# Altium PCB PCB1.PcbDoc
Units mm, origin at the board's own origin, x right, y up, seen from the top; angles counter-clockwise.
Board outline 90 x 47 mm, 2 copper layers (Top Layer, Bottom Layer); 79 components, 46 nets, 192 pads, 112 vias.
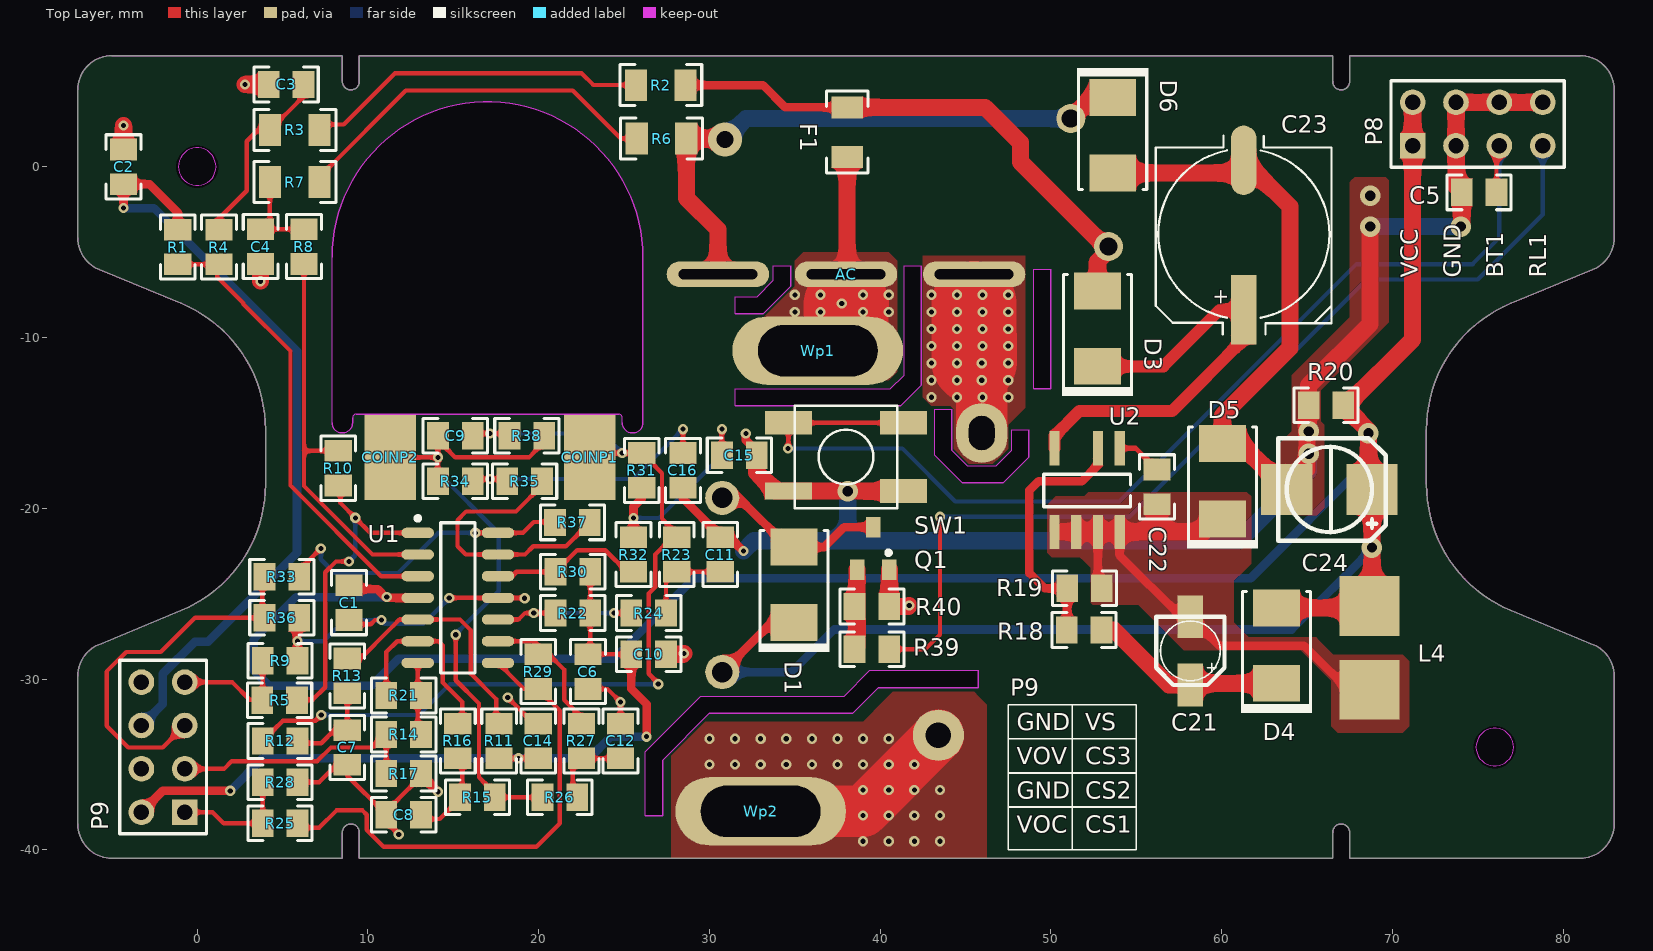
[diagram p0: Top Layer view]
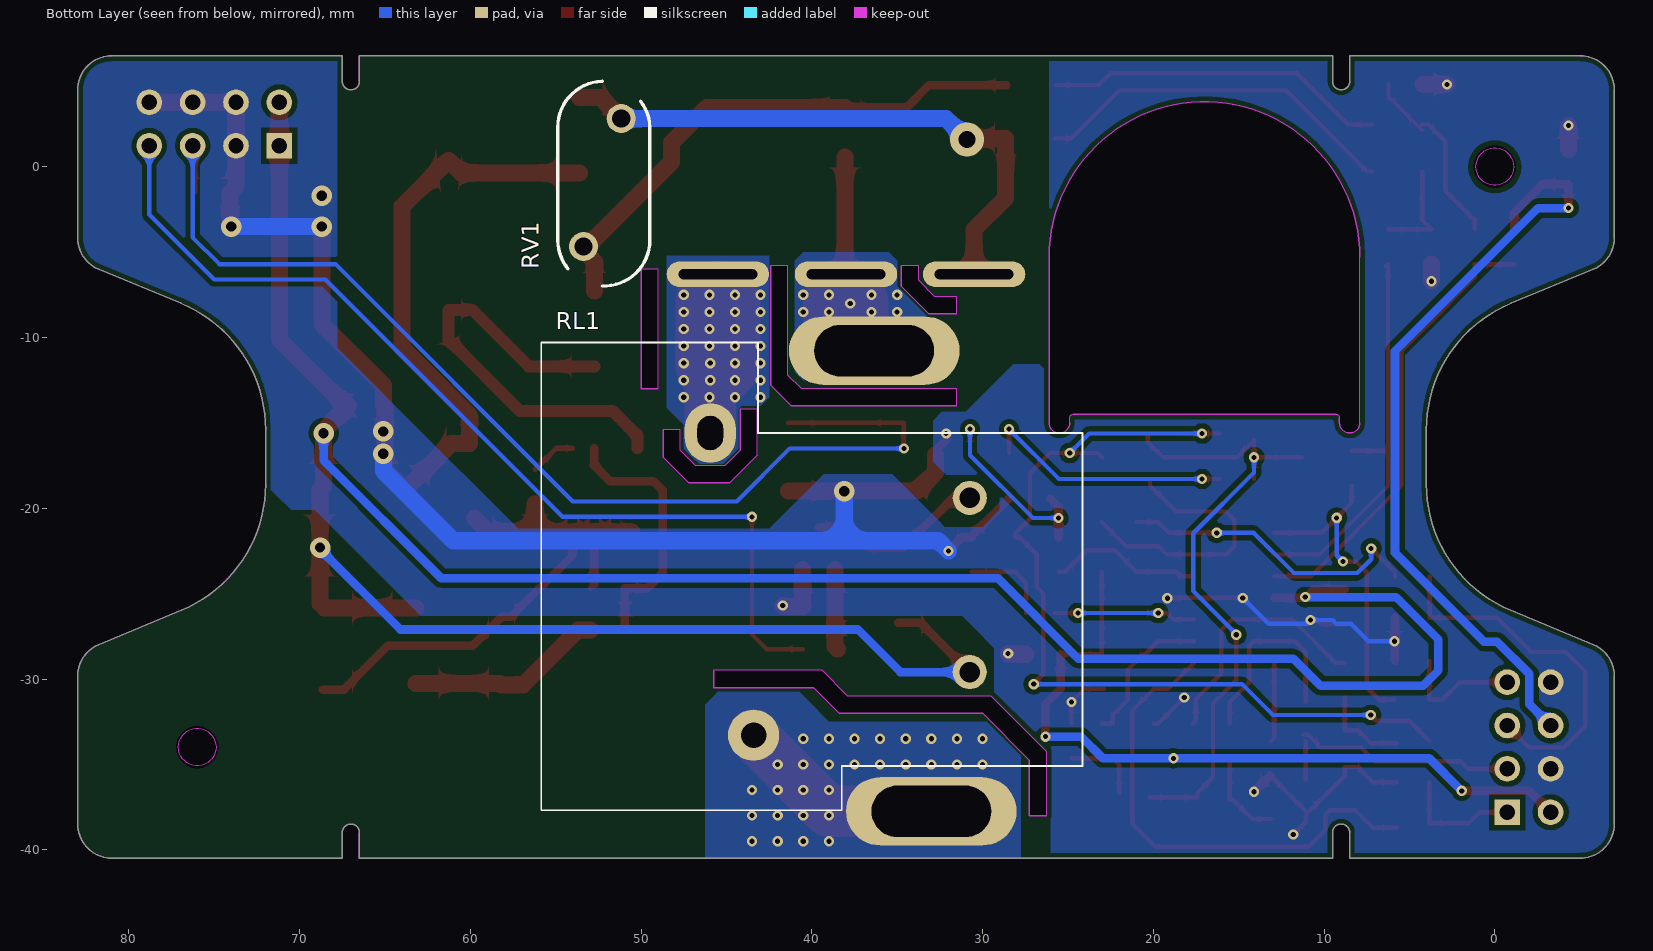
[diagram p1: Bottom Layer view, seen from below]

## Layer stack, top to bottom
Top Solder: solder mask 0.0102, Solder Resist, Dk 3.5
Top Layer: signal copper 0.0356
Dielectric 1: dielectric 0.32, FR-4, Dk 4.8
Bottom Layer: signal copper 0.0356
Bottom Solder: solder mask 0.0102, Solder Resist, Dk 3.5

## Board outline
-7.002,-38.492 -7.002,-29.829 cw(c-5.002,-29.829) -5.767,-27.981 -0.941,-25.982 ccw(c-4.002,-18.591) 3.998,-18.591 3.998,-15.394 ccw(c-4.002,-15.394) -0.941,-8.003 -5.767,-6.004 cw(c-5.002,-4.156) -7.002,-4.156 -7.002,4.508 cw(c-5.002,4.508) -5.002,6.508 8.498,6.508 8.498,5.008 ccw(c8.998,5.008) 9.498,5.008 9.498,6.508 66.498,6.508 66.498,5.008 ccw(c66.998,5.008) 67.498,5.008 67.498,6.508 80.998,6.508 cw(c80.998,4.508) 82.998,4.508 82.998,-4.156 cw(c80.998,-4.156) 81.763,-6.004 76.937,-8.003 ccw(c79.998,-15.394) 71.998,-15.394 71.998,-18.591 ccw(c79.998,-18.591) 76.937,-25.982 81.763,-27.981 cw(c80.998,-29.829) 82.998,-29.829 82.998,-38.492 cw(c80.998,-38.492) 80.998,-40.492 67.498,-40.492 67.498,-38.992 ccw(c66.998,-38.992) 66.498,-38.992 66.498,-40.492 9.498,-40.492 9.498,-38.992 ccw(c8.998,-38.992) 8.498,-38.992 8.498,-40.492 -5.002,-40.492 cw(c-5.002,-38.492)
cut-out: 26.25,-38 26.25,-34.25 29.5,-31 37.9,-31 39.4,-29.5 45.75,-29.5 45.75,-30.5 39.9,-30.5 38.4,-32 30,-32 27.25,-34.75 27.25,-38
cut-out: 31.5,-8.6 31.5,-7.6 32.8,-7.6 33.75,-6.65 33.75,-5.8 34.75,-5.8 34.75,-7 33.15,-8.6
cut-out: 31.5,-14 31.5,-13 40.6,-13 41.4,-12.2 41.4,-5.8 42.4,-5.8 42.4,-12.8 41.2,-14
cut-out: 49,-13 49,-6 50,-6 50,-13
cut-out: 7.898,-14.992 7.898,-5.292 cw(c16.998,-5.292) 26.098,-5.292 26.098,-14.992 cw(c25.498,-14.992) 24.898,-14.992 24.898,-14.692 ccw(c24.698,-14.692) 24.698,-14.492 9.298,-14.492 ccw(c9.298,-14.692) 9.098,-14.692 9.098,-14.992 cw(c8.498,-14.992)
cut-out: 44.796,-18.504 43.196,-16.904 cw(c43.2,-16.9) 43.195,-16.9 43.195,-14.2 cw(c43.2,-14.2) 43.2,-14.195 44.2,-14.195 cw(c44.2,-14.2) 44.205,-14.2 44.205,-16.598 45.102,-17.495 46.798,-17.495 47.695,-16.598 47.695,-15.4 cw(c47.7,-15.4) 47.7,-15.395 48.7,-15.395 cw(c48.7,-15.4) 48.705,-15.4 48.705,-17 cw(c48.7,-17) 48.704,-17.004 47.204,-18.504 cw(c47.2,-18.5) 47.2,-18.505 44.8,-18.505 cw(c44.8,-18.5)

## Design rules (kind name [scope] priority, off if disabled: settings)
Clearance Clearance_1 [InNet('GND')] p1: gap=0.3
Clearance cutout [IsRegion] p2: gap=0.01
Clearance keepout [OnLayer('Keep-Out Layer')] p3: gap=0.01
Clearance [All] p4: gap=0.254
HoleSize [All] p1: absolutevalues=TRUE maxlimit=5 minlimit=0.01 maxpercent=80.000 minpercent=20.000
PolygonConnect [All] p1: connectstyle=Direct reliefconductorwidth=0.254 reliefentries=4 polygonreliefangle="90 Angle" airgapwidth=0.254
RoutingVias [All] p1: holewidth=0.3 width=0.6 viastyle="Through Hole" minholewidth=0.3 minwidth=0.6 maxholewidth=5 maxwidth=5
SilkToSilkClearance [All] p1: silktosilkclearance=0.1
SilkToSolderMaskClearance [IsPad] p1: minsilkscreentomaskgap=0.01 clearancetoexposedcopper=TRUE
SolderMaskExpansion [All] p1: expansion=0.102
Width [All] p1: maxlimit=5 minlimit=0.254 preferedwidth=0.254
27 further rules are at their usual default settings.

## Components (designator, comment, footprint, x,y, rotation, side; value= is the part's Value field where it differs from the comment)
AC "Header 3" CHAN3DONG 30.498,-6.292 r0 top
C1 "104" 0805_HV 8.89,-25.527 r90 top
C2 "104" 0805_HV -4.318,0 r270 top
C3 "221" 0805_HV 5.207,4.826 r0 top
C4 "221" 0805_HV 3.708,-4.674 r90 top
C5 "221" 0805_HV 75.082,-1.499 r0 top
C6 "104" 0805_HV 22.885,-29.566 r90 top
C7 "221" 0805_HV 8.788,-34.011 r90 top
C8 "221" 0805_HV 12.09,-37.948 r0 top
C9 "221" 0805_HV 15.113,-15.748 r0 top
C10 "104" 0805_HV 26.441,-28.55 r180 top
C11 "221" 0805_HV 30.632,-22.708 r270 top
C12 "221" 0805_HV 24.79,-33.63 r270 top
C14 "104" 0805_HV 19.964,-33.63 r270 top
C15 "221" 0805_HV 31.75,-16.891 r180 top
C16 "221" 0805_HV 28.448,-17.78 r90 top
C21 "10uF" TU_NHOM_10uF_MH 58.166,-28.346 r0 top
C22 "104" 0805_HV 56.21,-18.745 r90 top
C23 "400AX6R8M8x11" PANACAP-G-GENERIC 61.29,-3.937 r90 top
C24 "220uF" TU_NHOM_2.5_MH 66.309,-18.898 r270 top
COINP1 "Socket" PIN1#1 96.749,-39.907 r90 top
COINP2 "Socket" PIN1#2 86.589,-39.907 r90 top
D1 "US1M-13-F" SMB 34.95,-24.486 r270 top
D3 "US1M-13-F" SMB 52.73,-9.474 r270 top
D4 "US1M-13-F" SMB 63.221,-28.041 r270 top
D5 "US1M-13-F" SMB 60.046,-18.415 r270 top
D6 "US1M-13-F" SMB 53.619,1.854 r90 top
F1 "Res" 1206 38.067,2.03 r90 top
L4 "680uF" "Inductor 4.5x5" 68.758,-28.423 r270 top
P8 "Header 4X2" HDR2X4 71.188,1.237 r0 top
P9 "Header 4X2" HDR2X4 -0.732,-37.803 r90 top
Q1 "C1815" SOT23B 39.599,-22.352 r180 top
R1 "22K" 0805_HV -1.143,-4.699 r90 top
R2 "1.2M" 1206 27.148,4.79 r180 top
R3 "1.2M" 1206 5.715,2.159 r180 top
R4 "2.2K" 0805_HV 1.27,-4.699 r90 top
R5 "10K" 0805_HV 4.826,-31.242 r0 top
R6 "1.2M" 1206 27.196,1.657 r180 top
R7 "1.2M" 1206 5.715,-0.889 r180 top
R8 "2.2K" 0805_HV 6.248,-4.674 r90 top
R9 "10K" 0805_HV 4.851,-28.931 r0 top
R10 "22K" 0805_HV 8.255,-17.653 r90 top
R11 "22K" 0805_HV 17.678,-33.63 r270 top
R12 "220K" 0805_HV 4.851,-33.63 r180 top
R13 "220K" 0805_HV 8.788,-29.82 r270 top
R14 "10K" 0805_HV 12.09,-33.249 r0 top
R15 "220K" 0805_HV 16.408,-36.932 r0 top
R16 "220K" 0805_HV 15.265,-33.63 r270 top
R17 "10K" 0805_HV 12.09,-35.535 r0 top
R18 "13k" 0805_HV 51.943,-27.127 r0 top
R19 "2K" 0805_HV 51.968,-24.689 r180 top
R20 "3k3" 0805_HV 66.116,-13.97 r0 top
R21 "100K" 0805_HV 12.09,-30.963 r180 top
R22 "22K" 0805_HV 21.996,-26.137 r0 top
R23 "1K" 0805_HV 28.092,-22.708 r90 top
R24 "1K" 0805_HV 26.441,-26.137 r0 top
R25 "10K" 0805_HV 4.851,-38.456 r0 top
R26 "1K" 0805_HV 21.234,-36.932 r180 top
R27 "1K" 0805_HV 22.504,-33.63 r270 top
R28 "10K" 0805_HV 4.851,-36.043 r0 top
R29 "22K" 0805_HV 19.964,-29.566 r90 top
R30 "22K" 0805_HV 21.996,-23.724 r0 top
R31 "1M" 0805_HV 26.035,-17.78 r90 top
R32 "1M" 0805_HV 25.552,-22.708 r90 top
R33 "10K" 0805_HV 4.953,-24.003 r0 top
R34 "1M" 0805_HV 15.113,-18.415 r180 top
R35 "1M" 0805_HV 19.177,-18.415 r180 top
R36 "10K" 0805_HV 4.953,-26.416 r0 top
R37 "22K" 0805_HV 21.971,-20.828 r0 top
R38 "1K" 0805_HV 19.304,-15.748 r0 top
R39 "1K" 0805_HV 39.516,-28.25 r0 top
R40 "10K" 0805_HV 39.516,-25.75 r0 top
RL1 "Component_1" RELAY30ASLA12VDC 45.95,-15.593 r180 bottom locked
RV1 "S10K275E2" VAR_S10K275E2 52.181,-0.984 r270 bottom
SW1 "PB SW" Switch-PB-6.2x6.3mm-SMD 37.998,-16.992 r180 top locked
U1 "LM324" D014_L 15.265,-25.248 r0 top
U2 "LNK306" "SOP 7" 54.026,-16.485 r270 top
Wp1 "Socket" PIN1#3 37.303,-48.452 r0 top
Wp2 "Socket" PIN1#4 85.75,-37.75 r0 top

## Footprints (in the part's own frame and the unit in brackets; to place one, negate y for a bottom-side part, rotate by r counter-clockwise, add the part's x,y. Pads: shape width x height; smd on the part's side, far side on the other; paste and mask are expansions set on the pad)
0805_HV [mil] "0805 with 30mil clearance between pads"
  rect 50x63 smd: 1(-40,0) 2(40,0)
  silkscreen extent -74,-40 74,40, body extent -43,-29 43,29, height 57
1206 [mm] "1206 from SM-752 data"
  rect 1.3x1.85 smd: 1(1.45,0) 2(-1.45,0)
  silkscreen extent -2.4,-1.21 2.4,1.21, body extent -1.7,-0.9 1.7,0.9, height 1.35
CHAN3DONG [mm]
  oval 6x1.5 hole 0.6 slot 4.6 at 0 deg: 1(0,0) 2(7.5,0) 3(15,0)
D014_L [mm] "14-Pin Small Outline Integrated Circuit 1.27 mm Pitch, IPC High Density"
  oval 1.9x0.6 smd: 1(-2.35,3.81) 2(-2.35,2.54) 3(-2.35,1.27) 4(-2.35,0) 5(-2.35,-1.27) 6(-2.35,-2.54) 7(-2.35,-3.81) 8(2.35,-3.81) 9(2.35,-2.54) 10(2.35,-1.27) 11(2.35,0) 12(2.35,1.27) 13(2.35,2.54) 14(2.35,3.81)
  silkscreen extent -2.47,-4.4 1,4.78, body extent -1.95,-4.33 1.95,4.33, height 1.75
HDR2X4 [mm] "Connector; Header; 4x2 Position"
  rect 1.5x1.5 hole 0.9: 1(0,0)
  round 1.5 hole 0.9: 2(0,2.54) 3(2.54,0) 4(2.54,2.54) 5(5.08,0) 6(5.08,2.54) 7(7.62,0) 8(7.62,2.54)
  silkscreen extent -1.27,-1.27 8.89,3.81
"Inductor 4.5x5" [mm]
  rect 3.5x3.5 smd: 1(2.2,-0.1) 2(-2.7,-0.1)
  body extent -2.6,-2.6 2.2,2.2, height 2
PANACAP-G-GENERIC [mil]
  rect 160x59.06 smd: 1(-175,0)
  oval 160x59.06 smd: 2(170,0)
  silkscreen extent -231,-203 227,203, body extent -233,-203 223,203, height 402
PIN1#1 [mm] "Connector; Plug"
  rect 5x3 smd: 1(22.889,73.762)
PIN1#2 [mm] "Connector; Plug"
  rect 5x3 smd: 1(22.889,75.286)
PIN1#3 [mm] "Connector; Plug"
  oval 10x4 hole 3 slot 7 at 0 deg: 1(-0.956,37.682)
PIN1#4 [mm] "Connector; Plug"
  oval 10x4 hole 3 slot 7 at 0 deg: 1(-52.75,0)
RELAY30ASLA12VDC [mm]
  round 2 hole 1.2 paste+0 mask+0: 1(15.202,-3.8) 2(15.2,-14)
  round 3 hole 1.5 paste+0 mask+0: 3(2.54,-17.7)
  oval 3x3.5 hole 1.5 slot 2 at 90 deg paste+0 mask+0: 4(0,0)
  silkscreen extent -9.9,-22.1 21.8,5.3
SMB [mm] "Molded Diode, 2-Leads, Body 5.4x3.6mm, IPC Medium Density, based on OnSemi component dimensions"
  rect 2.159x2.743 smd: 1(2.21,0) 2(-2.21,0)
  silkscreen extent -3.18,-2.08 3.94,2.08, body extent -2.7,-1.8 2.7,1.8, height 2.32
"SOP 7" [mm]
  rect 2x0.6 smd: 1(0,0) 2(0,-1.27) 4(0,-3.81) 5(4.9,-3.81) 6(4.9,-2.54) 7(4.9,-1.27) 8(4.9,0)
  silkscreen extent 1.52,-4.44 3.43,0.64
SOT23B [mm] "SOT 23B"
  rect 0.85x1.2 smd: 1(0.95,1.25) 2(0,-1.25) 3(-0.94,1.245)
  silkscreen extent -1.02,0.13 -0.77,0.38, body extent -1.5,-1.2 1.5,1.3, height 1.06
Switch-PB-6.2x6.3mm-SMD [mm]
  rect 2.75x1.4 smd: 1(-3.375,2) 2(-3.375,-2) 2(3.375,-2)
  rect 2.75x1 smd: 1(3.375,2)
  silkscreen extent -3,-3 3,3, body extent -4,-3 4,3.3, height 3.1
TU_NHOM_2.5_MH [mm]
  rect 3x3 smd: 1(0,2.5) 2(0,-2.5)
  silkscreen extent -3,-3 3,3.3, body extent -3.3,-3.5 3.3,3.5, height 8.11
TU_NHOM_10uF_MH [mm]
  rect 1.5x2.5 smd: 1(0,-2) 2(0,2)
  silkscreen extent -2,-2 2,2, body extent -2.15,-2.5 2.15,2.5, height 5.4
VAR_S10K275E2 [mm] "EPCOS"
  round 1.7 hole 1.067: 1(-3.81,1.016) 2(3.69,-1.184)
  silkscreen extent -6,-2.7 6,2.7, body extent -6.02,-2.7 5.98,2.7, height 15

## Part data
AC: "Header, 3-Pin"
C1 C2 C3 C4 C5 C6 C7 C8 C9 C10 C11 C12 C14 C15 C16 C22: library part CM, "Cap SMD"
C21: library part TU_NHOM_10uF_25V_MH, "TU_NHOM_10uF_25V_MH"
C23: "CAP, AL, 6.8uF, 400V, +/-20%, TH"
C24: library part TU_NHOM_220uF_25V_MH, "TU_NHOM_220uF_25V_MH"
D1 D3 D4 D5 D6: library part MURS160-13-F, "Diode, Ultrafast, 600V, 1A, SMB"
F1: library part Res-SMD, "Resistor"
L4: library part "Inductor 4.5x5_MH"
P8 P9: "Header, 4-Pin, Dual row"
Q1: "NPN 600mW, ECB"
R1 R2 R3 R4 R5 R6 R7 R8 R9 R10 R11 R12 R13 R14 R15 R16 R17 R18 R19 R20 R21 R22 R23 R24 R25 R26 R27 R28 R29 R30 R31 R32 R33 R34 R35 R36 R37 R38 R39 R40: library part R, "Resistor 1/4W"
RV1: "Varistor 275V RMS 10MM Radial, TH"
SW1: library part Switch-PB-6.2x6.3mm-SMD, "Tactile Switch, SPNO, SMD, 160gf, 6.2x6.3x2.5mm"
U1: library part LM324_MH, "Op x 4"
U2: library part Component_1

## Free pads (board coordinates)
  round 2 hole 1 paste+0: 1(30.912,1.6)
  round 2 hole 2.5 paste+0: 2(0,0) 3(76,-34)

## Via types
v1: diameter 0.6, hole 0.3, Top Layer to Bottom Layer, tented both sides, 104 vias
v2: diameter 1.2, hole 0.6, Top Layer to Bottom Layer, tented both sides, 8 vias

## Nets (pads, with @x,y where several pads share a name; then routed paths per layer and width w, separated by ;. In a path a pad name is that pad's centre, name@x,y a point inside that pad or via, vN(x,y) a via of type N, cw(c..) or ccw(c..) an arc to the next point about the centre after c; other vN are vias at no path point)
BP: C22.2 U2.1 | length 2.7
  Top Layer w0.3: U2.1 54.966,-16.485 C22.2
BUTTON1: C5.2 P8.5 SW1.2 | length 65.8
  Top Layer w0.254: v1(34.6,-16.5) 34.623,-16.477 34.623,-14.992 SW1.2@41.373,-14.992 ; C5.2 76.098,1.068 P8.5
  Bottom Layer w0.254: v1(34.6,-16.5) 41.3,-16.5 44.4,-19.6 54,-19.6 67.9,-5.7 74.7,-5.7 76.268,-4.132 P8.5
C1: R14.2 R21.1 U1.7 | length 4.7
  Top Layer w0.254: U1.7 12.915,-33.439 R14.2@13.106,-33.63
C2: R25.2 R29.1 U1.8 | length 29.3
  Top Layer w0.254: R25.2@5.74,-38.71 7.137,-38.71 8.153,-37.694 9.677,-37.694 9.931,-37.948 9.931,-38.837 10.012,-38.918 10.012,-38.925 10.915,-39.827 19.863,-39.827 21.234,-38.456 21.234,-35.974 21.234,-31.852 R29.1 19.139,-30.582 U1.8
C3: R33.2 R37.1 U1.14 | length 18.2
  Top Layer w0.254: R33.2@5.842,-24.003 5.842,-23.749 v1(7.239,-22.352) ; v1(16.281,-21.438) U1.14 19.075,-21.438 19.71,-20.803 R37.1@20.98,-20.803
  Bottom Layer w0.254: v1(7.239,-22.352) 7.239,-22.987 8.047,-23.795 11.765,-23.795 14.122,-21.438 v1(16.281,-21.438)
CUR_N: C9.1 COINP2.1 R15.2 R26.2 R34.2 R38.2 | length 38.8
  Top Layer w0.254: COINP2.1 14.034,-17.018 v1@14.097,-16.954 ; R34.2@14.097,-18.288 v1(14.097,-17.018) v1@14.097,-16.954 ; v1(15.138,-27.407) 15.138,-30.074 16.497,-31.432 16.497,-35.75 17.424,-36.678 R15.2 R26.2 ; R38.2@20.32,-15.621 R38.2 20.32,-16.129 19.431,-17.018 15.113,-17.018 14.097,-16.002 v1@14.097,-16.954
  Bottom Layer w0.254: v1(14.097,-17.018) 14.097,-17.907 17.653,-21.463 17.653,-24.847 15.138,-27.362 v1(15.138,-27.407)
CUR_P: C9.2 COINP1.1 R12.2 R23.2 R31.2 R38.1 | length 53.5
  Top Layer w0.254: R12.2 5.016,-32.448 6.921,-32.448 v1(7.264,-32.106) ; C9.2@16.129,-15.621 v1(17.145,-15.621) R38.1@18.288,-15.621 ; COINP1.1 23.241,-16.764 v1(24.892,-16.764) R31.2 27.216,-17.945 27.216,-20.612 28.092,-21.488 R23.2 27.838,-21.692 26.822,-22.708 26.822,-24.613 26.441,-24.994 26.441,-29.693 27,-30.251 v1(27,-30.3)
  Bottom Layer w0.254: v1(7.264,-32.106) 12.994,-32.106 14.8,-30.3 v1(27,-30.3) ; v1(17.145,-15.621) 23.749,-15.621 v1(24.892,-16.764)
CURRENT_SIGNAL1: P9.1 R25.1 R28.1 | length 7.3
  Top Layer w0.254: P9.1 0.896,-37.803 1.549,-38.456 R25.1 R28.1
CURRENT_SIGNAL2: P9.3 R14.1 R17.1 | length 15.1
  Top Layer w0.254: P9.3 1.567,-35.263 2.019,-34.811 7.03,-34.811 7.83,-34.011 10.185,-34.011 10.947,-33.249 R14.1 R14.1@11.201,-33.249 ; R17.1@11.074,-35.916 R17.1 R14.1@11.074,-33.63
CURRENT_SIGNAL3: P9.5 R33.1 R36.1 | length 21.6
  Top Layer w0.254: P9.5 -2.02,-34.011 -4.039,-34.011 -5.309,-32.741 -5.309,-29.566 -4.166,-28.423 -2.134,-28.423 -0.127,-26.416 3.81,-26.416 R33.1@3.81,-24.003
FB: R18.1 R19.2 U2.2 | length 15.5
  Top Layer w0.5: R18.1 50.952,-27.102 R19.2 49.632,-24.689 48.743,-23.8 48.743,-18.948 49.276,-18.415 51.816,-18.415 52.756,-17.475 U2.2
GND: C1.1 C2.1 C3.1 C4.1 C5.1 C6.1 C7.1 C8.1 C10.1 C11.1 C12.1 C14.1 C15.1 C16.1 C23.2 C24.2 D5.2 D6.2 P8.3 P8.4 P8.6 P8.8 P9.4 P9.8 Q1.3 R9.2 R17.2 R20.1 R28.2 R36.2 R40.2 SW1.1 U1.11 | length 169.1
  Top Layer w0.254: R28.2@5.74,-36.043 R28.2 7.137,-36.043 8.026,-35.154 8.788,-35.154 8.788,-35.662 10.963,-37.837 R17.2@13.15,-35.65 ; C1.1@8.763,-26.797 10.16,-26.797 10.414,-26.543 v1(10.795,-26.543) ; C8.1 11.074,-38.374 v1(11.8,-39.1) ; v1(14.757,-25.248) U1.11 19.152,-25.248 v1(19.177,-25.273) ; v1(18.186,-31.09) 19.71,-32.614 C14.1 ; C6.1 24.028,-30.582 v1(24.79,-31.344) C12.1
  Top Layer w0.5: R36.2@5.842,-26.416 5.842,-27.762 v1(5.867,-27.788) R9.2 ; R17.2@13.15,-35.65 v1(14.1,-36.6) ; C16.1@28.448,-19.431 30.632,-21.615 C11.1 31.192,-21.692 v1(32,-22.5) ; v1(32.131,-15.621) 32.131,-16.002 32.766,-16.637 C15.1
  Top Layer w1: C2.1 v1(-4.318,2.413) ; v1(2.794,4.826) C3.1 ; v1(3.7,-6.7) 3.708,-6.692 C4.1 ; C10.1 28.45,-28.55 v1(28.5,-28.5) ; C15.1 32.766,-17.907 33.851,-18.992 34.623,-18.992 SW1.1@41.373,-18.992 ; Q1.3 40.538,-25.744 R40.2 41.65,-25.75 v1(41.7,-25.7) ; D6.2 60.554,-0.356 C23.2 64,-2.329 64,-10.6 60.046,-14.554 D5.2 61.116,-16.205 C24.2 65,-17.706 65,-14.07 R20.1 65.1,-12.8 68.7,-9.2 v2(68.7,-3.5) ; v2(74,-3.5) 74.066,-3.434 C5.1 73.728,-1.16 P8.3 P8.4 P8.6 P8.8
  Bottom Layer w0.254: v1(5.867,-27.788) 7.391,-27.788 8.407,-26.772 9.265,-26.772 9.493,-26.543 10.751,-26.543 10.979,-26.772 13.233,-26.772 v1(14.757,-25.248)
  Bottom Layer w1: v1(32,-22.5) 32.6,-21.9 38.1,-21.9 ; v2(38.1,-19) 38.1,-21.9 ; v2(65.1,-16.8) 65.1,-17.8 61,-21.9 38.1,-21.9 ; v2(68.7,-3.5) v2(74,-3.5)
  other v2: 65.1,-15.5 68.7,-1.7
L: AC.2 F1.2 Wp1.1 | length 13
  Top Layer w0.5: 38.024,-7.061 38.024,-6.267 AC.2@38.067,-6.223
  Top Layer w1: Wp1.1@35,-10.5 36.009,-10.035 Wp1.1@37.998,-9.119 ; AC.2@38.067,-6.223 F1.2
  Top Layer w3: v1@38.024,-8.077 38.024,-7.061
  Top Layer w5: Wp1.1@37.998,-9.119 37.998,-8.103 v1@38.024,-8.077
  other v1: 35,-8.5 36.5,-8.5 39,-8.5 40.5,-8.5 37.75,-8 35,-7.5 36.5,-7.5 39,-7.5 40.5,-7.5
L1: AC.3 RL1.4 | length 7.6
  Top Layer w3: RL1.4 v1(45.95,-12.5) v1(45.95,-11.5) v1@45.95,-11.381
  Top Layer w5: 45.498,-8.026 45.499,-8.499 45.499,-8.501 45.499,-8.999 45.499,-9.499 45.499,-9.501 45.499,-9.999 45.5,-10.499 45.5,-10.501 45.5,-11.4
  other v1: 43,-13.5 44.5,-13.5 46,-13.5 47.5,-13.5 43,-12.5 44.5,-12.5 47.5,-12.5 43,-11.5 44.5,-11.5 47.5,-11.5 43,-10.5 44.5,-10.5 46,-10.5 47.5,-10.5 43,-9.5 44.5,-9.5 46,-9.5 47.5,-9.5 43,-8.5 44.5,-8.5 46,-8.5 47.5,-8.5 43,-7.5 44.5,-7.5 46,-7.5 47.5,-7.5
LL: D3.2 F1.1 R2.2 RV1.2 | length 32.2
  Top Layer w0.5: R2.2 33.133,4.79 34.442,3.48 F1.1
  Top Layer w1: F1.1 46.152,3.48 48.209,1.422 48.209,0.291 53.326,-4.826 53.442,-4.826 52.73,-5.537 D3.2
LOUT: RL1.3 Wp2.1 | length 12.3
  Top Layer w3: Wp2.1 39,-37.75 43.41,-33.34 RL1.3
  other v1: 39,-39.5 40.5,-39.5 42,-39.5 43.5,-39.5 39,-38 40.5,-38 42,-38 43.5,-38 39,-36.5 40.5,-36.5 42,-36.5 43.5,-36.5 30,-35 31.5,-35 33,-35 34.5,-35 36,-35 37.5,-35 39,-35 40.5,-35 42,-35 30,-33.5 31.5,-33.5 33,-33.5 34.5,-33.5 36,-33.5 37.5,-33.5 39,-33.5 40.5,-33.5
N: AC.1 D6.1 pad.1 R6.2 RV1.1 | length 34.7
  Top Layer w1: AC.1 30.498,-3.676 28.646,-1.823 R6.2 30.855,1.657 pad.1 ; RV1.1 52.403,4.064 D6.1
  Bottom Layer w1: pad.1 32.138,2.826 RV1.1
NetC3_2: C3.2 R3.1 R4.2 | length 11.2
  Top Layer w0.254: R4.2@1.168,-3.658 1.168,-3.132 2.9,-1.4 2.9,1.503 3.878,2.481 R3.1@4.289,2.481 ; R3.1 6.223,4.117 C3.2
NetC4_2: C4.2 R7.1 R8.2 | length 6.2
  Top Layer w0.254: R7.1@4.255,-0.273 4.255,-3.111 C4.2 R8.2
NetC7_2: C7.2 R12.1 R13.2 | length 5.3
  Top Layer w0.254: R12.1@5.74,-33.757 7.264,-33.757 8.026,-32.995 C7.2 R13.2@8.788,-31.09
NetC8_2: C8.2 R15.1 R16.2 | length 5.3
  Top Layer w0.254: C8.2@13.106,-38.202 14.198,-38.202 15.341,-37.059 15.519,-37.059 R16.2@15.519,-34.646
NetC11_2: C11.2 R23.1 R24.2 | length 5.2
  Top Layer w0.254: R24.2 27.457,-24.359 R23.1 C11.2
NetC12_2: C12.2 R26.1 R27.2 | length 4.6
  Top Layer w0.254: R26.1@21.996,-36.678 21.996,-35.027 22.377,-34.646 R27.2 23.012,-34.646 C12.2
NetC15_2: C15.2 R31.1 R32.2 | length 12.3
  Top Layer w0.254: C15.2 v1(30.734,-15.367)
  Top Layer w0.5: R32.2 v1(25.552,-20.574) 25.552,-19.914 R31.1@26.035,-19.431
  Bottom Layer w0.254: v1(25.552,-20.574) 25.552,-20.549 25.578,-20.574 27.051,-20.574 30.734,-16.891 v1(30.734,-15.367)
NetC16_2: C16.2 R34.1 R35.2 | length 15.9
  Top Layer w0.254: R34.1@16.129,-18.288 v1(17.145,-18.288) R35.2@18.161,-18.288 ; C16.2 v1(28.448,-15.367)
  Bottom Layer w0.254: v1(17.145,-18.288) 25.527,-18.288 v1(28.448,-15.367)
NetC21_1: C21.1 D4.1 R18.2 | length 11.6
  Top Layer w1: R18.2 53.696,-27.127 56.915,-30.346 C21.1 58.261,-30.252 D4.1@63.195,-30.252
NetD1_2: D1.2 Q1.2 RL1.1 | length 10.5
  Top Layer w0.5: RL1.1 31.712,-19.393 34.595,-22.276 D1.2 36.724,-22.276 37.898,-21.102 Q1.2
NetQ1_1: Q1.1 R39.1 R40.1 | length 4.7
  Top Layer w1: R39.1 38.649,-28.101 Q1.1
NetR1_1: R1.1 R4.1 U1.3 | length 26.7
  Top Layer w0.254: R1.1 1.143,-5.715 1.168,-5.69 1.168,-6.452 2.692,-7.976 2.692,-8.026 5.461,-10.795 5.461,-18.669 10.77,-23.978 U1.3
NetR2_1: R2.1 R3.2 | length 20
  Top Layer w0.254: R3.2@7.189,2.481 8.577,2.481 11.582,5.486 22.504,5.486 23.201,4.79 R2.1
NetR6_1: R6.1 R7.2 | length 21.7
  Top Layer w0.254: R7.2@7.155,-0.273 7.474,-0.273 12.217,4.47 21.996,4.47 24.81,1.657 R6.1
NetR8_1: R8.1 R10.2 U1.2 | length 23.7
  Top Layer w0.254: R8.1@6.375,-5.817 R8.1 6.248,-16.637 ; R10.2@8.382,-16.637 6.248,-16.637 ; U1.2@12.961,-22.662 U1.2 10.262,-22.708 6.248,-18.694 6.248,-16.637
NetR11_1: R11.1 R13.1 U1.5 | length 14.7
  Top Layer w0.254: R13.1@8.788,-29.058 9.309,-29.058 11.522,-26.844 11.522,-26.832 11.836,-26.518 U1.5 15.392,-26.518 16.027,-27.153 16.027,-29.693 17.505,-31.171 17.505,-32.441 R11.1
NetR16_1: R16.1 R21.2 U1.6 | length 11.6
  Top Layer w0.254: R21.2@11.074,-31.344 11.074,-28.423 11.709,-27.788 U1.6 14.122,-27.788 14.376,-28.042 14.376,-30.201 15.519,-31.344 R16.1@15.519,-32.614
NetR22_1: R22.1 R24.1 U1.10 | length 9.6
  Top Layer w0.254: U1.10 18.821,-26.518 19.202,-26.137 v1(19.71,-26.137) R22.1 ; v1(24.409,-26.137) R24.1 R24.1@25.806,-26.137
  Bottom Layer w0.254: v1(19.71,-26.137) v1(24.409,-26.137)
NetR27_1: R27.1 R29.2 U1.9 | length 8.7
  Top Layer w0.254: U1.9 19.71,-27.788 20.472,-28.55 20.599,-28.55 21.488,-29.439 21.488,-31.217 22.377,-32.106 22.377,-32.614 R27.1 R27.1@23.012,-32.614
NetR30_1: R30.1 R32.1 U1.12 | length 9.1
  Top Layer w0.254: U1.12 18.44,-23.978 18.694,-23.724 R30.1 22.25,-22.454 23.901,-22.454 25.171,-23.724 R32.1
NetR35_1: R35.1 R37.2 U1.13 | length 16.5
  Top Layer w0.254: R35.1@20.193,-18.288 R35.1 20.193,-18.669 18.669,-20.193 15.748,-20.193 15.24,-20.701 15.24,-22.225 15.723,-22.708 U1.13 19.192,-22.708 19.675,-22.225 21.59,-22.225 R37.2@23.012,-20.803
RL1C: P8.7 R39.2 | length 56.9
  Top Layer w0.254: R39.2 42.65,-28.25 43.5,-27.4 v1(43.5,-20.5)
  Bottom Layer w0.254: v1(43.5,-20.5) 54.6,-20.5 68.5,-6.6 75,-6.6 78.808,-2.792 P8.7
S: C21.2 C22.1 D5.1 L4.1 R19.1 U2.5 U2.6 U2.7 U2.8 | length 34.1
  Top Layer w0.3: R19.1@52.756,-24.46 R19.1 ; D5.1@59.766,-20.574 59.995,-20.574 D5.1
  Top Layer w0.5: R19.1@52.756,-24.46 U2.7 ; U2.8 54.026,-22.758 57.614,-26.346 C21.2 59.861,-28.042 64.821,-28.042 67.402,-30.623 L4.1
  Top Layer w1: 50.546,-21.385 U2.6 U2.7 U2.8 56.21,-21.385 ; C22.1 56.21,-21.385 ; D5.1@59.766,-20.574 58.956,-21.385 56.21,-21.385
V1: R5.2 R10.1 U1.1 | length 19.3
  Top Layer w0.254: R5.2@5.867,-31.217 6.756,-31.217 7.493,-30.48 7.493,-23.749 8.128,-23.114 v1(8.89,-23.114) ; R10.1@8.382,-18.669 8.382,-19.685 v1(9.258,-20.561) 10.135,-21.438 U1.1
  Bottom Layer w0.254: v1(8.89,-23.114) 9.258,-22.746 v1(9.258,-20.561)
VCC_RELAY: C1.2 C24.1 D1.1 D4.2 L4.2 P8.1 P8.2 R20.2 RL1.2 U1.4 | length 171.8
  Top Layer w0.5: C1.2@8.788,-24.74 10.566,-24.74 11.074,-25.248 U1.4 ; RL1.2 33.647,-26.696 D1.1 ; L4.2@68.549,-25.832 L4.2 L4.2@68.809,-25.572
  Top Layer w1: D4.2@63.195,-25.832 L4.2@68.549,-25.832 ; L4.2@68.809,-25.572 C24.1 68.6,-18.689 68.6,-15.438 R20.2 67.33,-13.97 71.188,-10.112 P8.1 P8.2
  Bottom Layer w0.5: v1(11.1,-25.2) 5.788,-25.2 3.3,-27.688 3.3,-29.5 4.2,-30.4 10.2,-30.4 11.8,-28.8 24.4,-28.8 29.1,-24.1 61.7,-24.1 68.6,-17.2 v2(68.6,-15.6) ; RL1.2 34.807,-29.593 37.3,-27.1 64.1,-27.1 68.8,-22.4 v2(68.8,-22.3)
VIN1: C23.1 D3.1 U2.4 | length 25.8
  Top Layer w0.7: U2.4 50.216,-15.748 51.664,-14.3 57.099,-14.3 61.29,-10.109 C23.1 59.893,-8.382 56.591,-11.684 D3.1
VOFFSET_CURRENT: C6.2 C10.2 C14.2 P9.2 R11.2 R22.2 R30.2 | length 46.3
  Top Layer w0.254: R11.2@18.059,-34.646 v1(18.821,-34.646) C14.2 C14.2@20.472,-34.646 ; R30.2 R22.2 23.012,-28.55 C10.2
  Top Layer w0.5: P9.2 -2.018,-36.549 1.928,-36.549 v1(1.93,-36.551) ; C10.2 25.425,-30.582 26.314,-31.471 v1(26.314,-33.376)
  Bottom Layer w0.5: v1(1.93,-36.551) 3.835,-34.646 v1(18.821,-34.646) 22.954,-34.646 24.224,-33.376 v1(26.314,-33.376)
VOFFSET_VOL: C2.2 P9.6 R1.2 | length 46.1
  Top Layer w0.254: P9.6 P9.6@-3.223,-32.723
  Top Layer w0.5: v1(-4.318,-2.413) C2.2 -2.794,-1.016 -1.143,-2.667 R1.2
  Bottom Layer w0.5: v1(-4.318,-2.413) -2.54,-2.413 5.842,-10.795 5.842,-22.606 0.635,-27.813 -0.135,-27.813 -2.018,-29.695 -2.018,-31.469 P9.6
VOL_SIGNAL: P9.7 R5.1 R9.1 | length 7.3
  Top Layer w0.254: P9.7 2.039,-30.183 3.073,-31.217 3.835,-31.217 R9.1

## Polygon pours and split planes (outlines as drawn)
S on Top Layer "Bottom Layer-No Net" (solid, remove dead copper, pour order 29): 61.468,-19.05 55.372,-19.05 52.705,-19.05 52.197,-19.05 51.943,-19.304 51.181,-19.304 50.292,-19.304 49.911,-19.685 49.784,-19.812 49.784,-21.463 49.784,-22.606 50.038,-22.86 50.673,-22.86 51.689,-22.86 51.943,-23.114 52.324,-23.495 52.324,-24.384 52.324,-25.527 52.451,-25.654 52.959,-25.654 55.118,-25.654 57.023,-27.559 57.785,-28.321 60.706,-28.321 64.643,-28.321 65.913,-29.591 66.421,-30.099 66.421,-32.766 66.802,-33.147 68.961,-33.147 70.612,-33.147 70.866,-32.893 70.993,-32.766 70.993,-31.369 70.993,-28.956 70.739,-28.702 70.612,-28.575 69.342,-28.575 66.548,-28.575 65.659,-27.686 65.532,-27.559 63.246,-27.559 61.595,-27.559 60.706,-26.67 60.706,-25.4 60.706,-24.257 61.341,-23.622 61.722,-23.241 61.722,-22.225 61.722,-19.304 61.468,-19.05
L on Top Layer "Bottom Layer-No Net" (solid, remove dead copper, pour order 15): 35,-5.5 35,-7 33.5,-8.5 32.5,-9.5 32.5,-11.5 32.5,-12 33,-12.5 37.5,-12.5 40.5,-12.5 41,-12 41,-7 41,-5.5 40.5,-5 35.5,-5
LOUT on Top Layer "Bottom Layer-No Net" (solid, remove dead copper, pour order 17): 27.75,-40.492 27.75,-35.25 27.75,-34.5 28.5,-33.75 29.75,-32.5 37.75,-32.5 39,-32.5 40.25,-31.25 40.75,-30.75 44.75,-30.75 45.5,-30.75 45.75,-31 46.25,-31.5 46.25,-32.75 46.25,-40.492
GND on Top Layer "Bottom Layer-No Net" (solid, remove dead copper, pour order 21): 69.8,-0.8 69.6,-0.6 68.2,-0.6 67.8,-0.6 67.6,-0.8 67.5,-0.9 67.5,-1.3 67.5,-8.8 65.3,-11 64.1,-12.2 64.1,-14.4 64.1,-15.5 63.4,-16.2 63.9,-16.7 63.9,-17.4 63.9,-20.1 64.2,-20.4 65.6,-20.4 65.8,-20.2 66,-20 66,-17.6 66,-15.1 65.8,-14.9 65.8,-13.2 65.8,-13.1 67.6,-11.3 69.8,-9.1 69.8,-0.8
GND on Top Layer "Bottom Layer-No Net" (solid, remove dead copper, pour order 22): 64.1,-12.2 64.1,-15.5 63.4,-16.2 63.3,-16.3 63.3,-17.8 65.6,-17.8 65.7,-17.9 65.6,-17.8 65.6,-14.5
L1 on Top Layer "Bottom Layer-No Net" (solid, remove dead copper, pour order 24): 42.5,-5.2 42.5,-8.5 42.5,-13.5 43,-14 43.9,-14 44.1,-14 44.3,-14.2 44.3,-15 44.3,-16.5 44.9,-17.1 45.2,-17.4 46.4,-17.4 46.6,-17.4 47,-17 47.5,-16.5 47.5,-15.3 47.5,-15.1 47.9,-14.7 48.5,-14.1 48.5,-10.7 48.5,-5.2
GND on Bottom Layer "Bottom Layer-No Net" (solid, remove dead copper, pour order 27): 26.416,-13.462 26.412,-13.458 26.412,-11.878 26.412,-11.815 26.67,-11.557 27.686,-11.557 28.194,-11.557 28.956,-12.319 30.988,-14.351 31.496,-14.351 32.385,-14.351 32.766,-14.732 32.893,-14.859 32.893,-16.383 32.893,-17.272 32.766,-17.399 32.131,-18.034 28.575,-18.034 25.781,-18.034 25.654,-18.161 26.289,-17.526 26.289,-12.065
L on Bottom Layer "Bottom Layer-No Net" (solid, remove dead copper, pour order 14): 35,-5.5 35,-7 33.5,-8.5 32.5,-9.5 32.5,-11.5 32.5,-12 33,-12.5 37.5,-12.5 40.5,-12.5 41,-12 41,-7 41,-5.5 40.5,-5 35.5,-5
GND on Bottom Layer "Bottom Layer-No Net" (solid, remove dead copper, pour order 18): 170 vertices, not listed, extent -7,-40.492 71.4,6.508
GND on Bottom Layer "Bottom Layer-No Net" (solid, remove dead copper, pour order 19): 66.1,-12.3 67.8,-10.6 67.8,-4.8 67.8,6.508 81.184,6.508 81.194,6.498 81.292,6.4 81.5,6.4 81.812,6.4 81.941,6.271 82.159,6.054 82.267,6.054 82.544,5.776 82.912,5.408 82.912,5.088 82.912,4.586 82.998,4.5 82.998,1.2 82.998,-4.944 82.669,-5.273 81.938,-6.004 81.763,-6.004 81.596,-6.004 81.5,-6.1 81.321,-6.279 81.1,-6.279 80.646,-6.279 80.324,-6.6 79.941,-6.983 79.4,-6.983 79.049,-6.983 78.8,-7.231 78.431,-7.6 77.8,-7.6 77.34,-7.6 76.937,-8.003 76.765,-8.175 76.522,-8.175 76.325,-8.175 75.9,-8.6 75.4,-9.1 75.2,-9.1 74.961,-9.1 74.332,-9.728 72.996,-11.064 72.996,-11.524 72.996,-11.804 72.7,-12.1 72.111,-12.689 72.111,-14.054 72.111,-18.089 71.7,-18.5 71.2,-18 64,-18
GND on Bottom Layer "Bottom Layer-No Net" (solid, remove dead copper, pour order 20): 71.7,-16.5 71.733,-16.533 71.733,-18.353 71.733,-18.867 71.4,-19.2 70.5,-20.1 68,-20.1 64.4,-20.1 63.1,-18.8 63.5,-18.4 63.5,-16 63.7,-16 66,-13.7 66.2,-13.5 71.1,-13.5
LOUT on Bottom Layer "Bottom Layer-No Net" (solid, remove dead copper, pour order 16): 27.75,-40.492 27.75,-35.25 27.75,-34.5 28.5,-33.75 29.75,-32.5 37.75,-32.5 39,-32.5 40.25,-31.25 40.75,-30.75 44.75,-30.75 45.5,-30.75 45.75,-31 46.25,-31.5 46.25,-32.75 46.25,-40.492
L on Bottom Layer "Bottom Layer-No Net" (solid, remove dead copper, pour order 13): 35,-5.5 35,-7 33.5,-8.5 32.5,-9.5 32.5,-11.5 32.5,-12 33,-12.5 37.5,-12.5 40.5,-12.5 41,-12 41,-7 41,-5.5 40.5,-5 35.5,-5
L1 on Bottom Layer "Bottom Layer-No Net" (solid, remove dead copper, pour order 23): 42.5,-5.2 42.5,-8.5 42.5,-13.5 43,-14 43.9,-14 44.1,-14 44.3,-14.2 44.3,-15 44.3,-16.5 44.9,-17.1 45.2,-17.4 46.4,-17.4 46.6,-17.4 47,-17 47.5,-16.5 47.5,-15.3 47.5,-15.1 47.9,-14.7 48.5,-14.1 48.5,-10.7 48.5,-5.2

## Keep-outs
Keep-Out Layer:
  circle w0.013: c75.998,-33.992 r1.1
  circle w0.013: c-0.002,0.008 r1.1
  pour cut-out: 49,-13 49,-6 50,-6 50,-13
  lines w0.01: 49,-13 50,-13
  lines w0.013: 47.7,-16.5 47.7,-15.4 ; 49,-13 49,-6 50,-6 50,-13 ; 47.7,-15.4 47.7,-16.6 46.8,-17.5 45.1,-17.5 44.2,-16.6 44.2,-16.5 44.2,-14.2 43.2,-14.2 43.2,-16.5 43.2,-16.9 44.8,-18.5 47.2,-18.5 48.7,-17 48.7,-16.6 48.7,-16.5 48.7,-15.4 47.7,-15.4 ; -7.002,-38.492 ccw(c-5.002,-38.492) -5.002,-40.492 8.498,-40.492 8.498,-38.992 cw(c8.998,-38.992) 9.498,-38.992 9.498,-40.492 66.498,-40.492 66.498,-38.992 cw(c66.998,-38.992) 67.498,-38.992 67.498,-40.492 80.998,-40.492 ccw(c80.998,-38.492) 82.998,-38.492 82.998,-29.829 ccw(c80.998,-29.829) 81.763,-27.981 76.937,-25.982 cw(c79.998,-18.591) 71.998,-18.591 71.998,-15.394 cw(c79.998,-15.394) 76.937,-8.003 81.763,-6.004 ccw(c80.998,-4.156) 82.998,-4.156 82.998,4.508 ccw(c80.998,4.508) 80.998,6.508 67.498,6.508 67.498,5.008 cw(c66.998,5.008) 66.498,5.008 66.498,6.508 9.498,6.508 9.498,5.008 cw(c8.998,5.008) 8.498,5.008 8.498,6.508 -5.002,6.508 ccw(c-5.002,4.508) -7.002,4.508 -7.002,-4.156 ccw(c-5.002,-4.156) -5.767,-6.004 -0.941,-8.003 cw(c-4.002,-15.394) 3.998,-15.394 3.998,-18.591 cw(c-4.002,-18.591) -0.941,-25.982 -5.767,-27.981 ccw(c-5.002,-29.829) -7.002,-29.829 -7.002,-38.492 ; 7.898,-14.992 ccw(c8.498,-14.992) 9.098,-14.992 9.098,-14.692 cw(c9.298,-14.692) 9.298,-14.492 24.698,-14.492 cw(c24.698,-14.692) 24.898,-14.692 24.898,-14.992 ccw(c25.498,-14.992) 26.098,-14.992 26.098,-5.292 ccw(c16.998,-5.292) 7.898,-5.292 7.898,-14.992 ; 26.25,-38 26.25,-34.25 29.5,-31 37.9,-31 39.4,-29.5 45.75,-29.5 45.75,-30.5 39.9,-30.5 38.4,-32 30,-32 27.25,-34.75 27.25,-38 26.25,-38 ; 31.5,-14 41.2,-14 42.4,-12.8 42.4,-5.8 41.4,-5.8 41.4,-12.2 40.6,-13 31.5,-13 31.5,-14 ; 31.5,-8.6 33.15,-8.6 34.75,-7 34.75,-5.8 33.75,-5.8 33.75,-6.65 32.8,-7.6 31.5,-7.6 31.5,-8.6

## Silkscreen, mask and mechanical layers (free items; w line width, h text height)
Top Overlay:
  lines w0.1: 47.5,-37.5 55,-37.5 ; 47.5,-35.5 55,-35.5 ; 47.5,-33.5 55,-33.5 ; 51.25,-40 51.25,-31.5 ; 47.5,-40 47.5,-36 47.5,-31.5 55,-31.5 55,-40 47.5,-40
  text "VCC" at 71.5,-6.5 h1 r90
  text "GND" at 74,-6.5 h1 r90
  text "BT1" at 76.5,-6.5 h1 r90
  text "RL1" at 79,-6.5 h1 r90
  text "P9" at 47.625,-30.988 h1
  text "GND" at 48,-33 h1
  text "VS" at 52,-33 h1
  text "VOV" at 48,-35 h1
  text "CS3" at 52,-35 h1
  text "GND" at 48,-37 h1
  text "CS2" at 52,-37 h1
  text "VOC" at 48,-39 h1
  text "CS1" at 52,-39 h1
Top Solder:
  lines w3: 34,-10.5 37.5,-7 ; 45.5,-7 45.5,-11.7 45.9,-12.1 45.9,-15.4
  lines w5: 30.25,-37.5 40,-37.5 43,-34.5 43,-33.25 ; 38,-10 38,-8
Mechanical 1:
  drawing of 157 lines, arcs and shapes, not listed
Mechanical 3:
  drawing of 355 lines, arcs and shapes, not listed

## Text inside footprints (layer, text, board x,y; h text height)
C23: Top Overlay "+" at 60.315,-8.137 h0.89 r90